# EAGLE board ALog-BottleLogger (EAGLE 8.4.0)
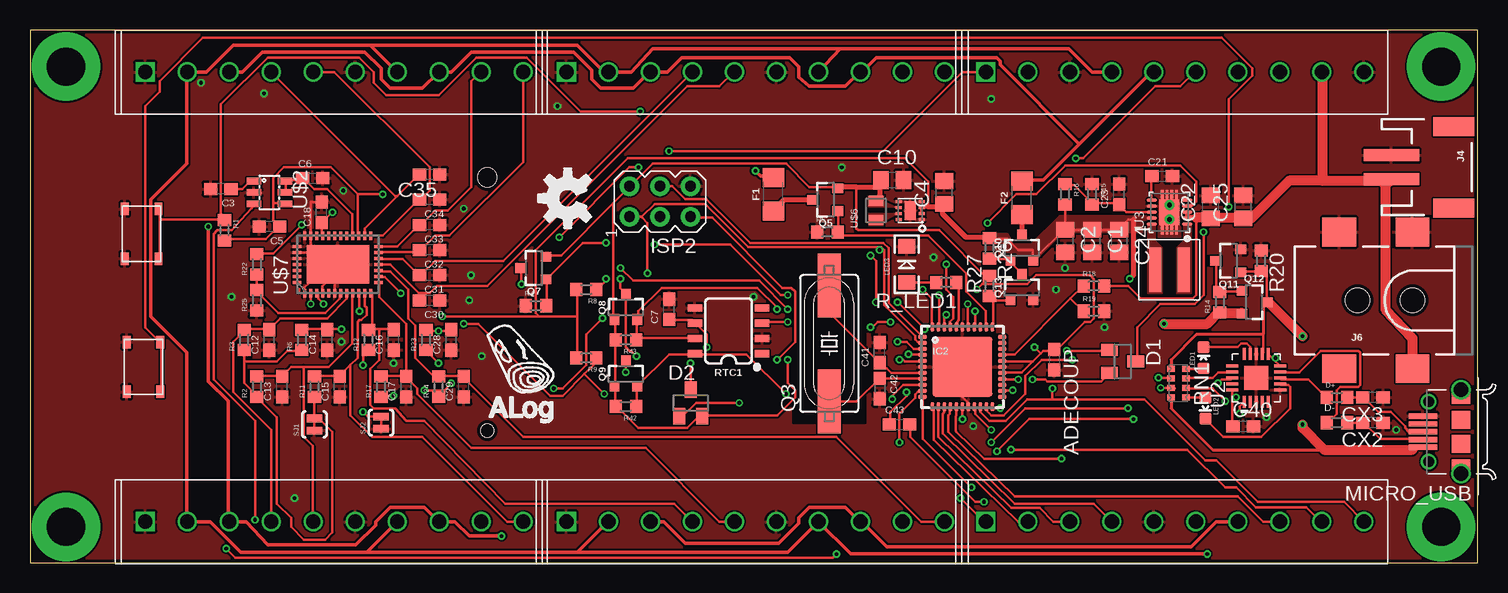
[diagram p0: board, top side]
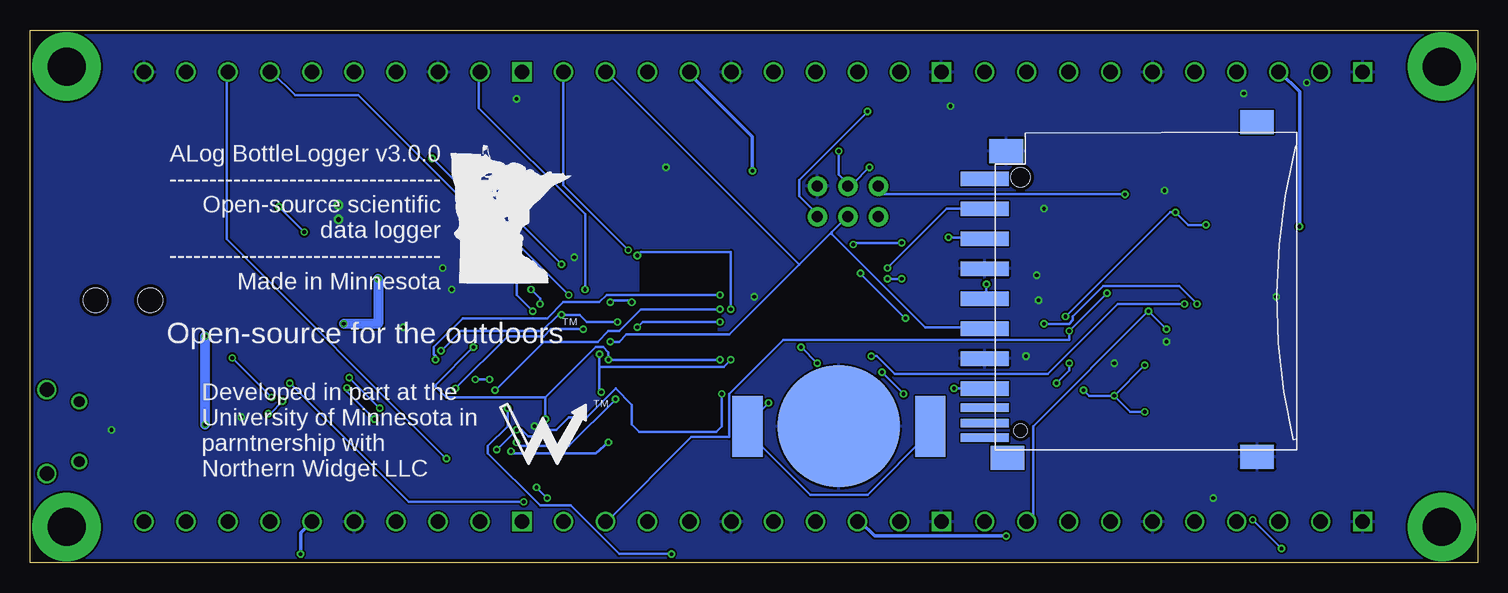
[diagram p1: board, bottom side, seen from below]

Size 120.65 x 44.45 mm. Coordinates in mm from the lower left corner, seen from the top.
Outline: 0,0 120.65,0 120.65,44.45 0,44.45 0,0
Copper layers (1*16): Top 0.035mm / dielectric 1.5mm / Bottom 0.035mm
Design rules "PCB-POOL Standard": minimum track width 0.15mm, minimum drill 0.3mm, track to track 0.15mm, track to pad 0.15mm, pad to pad 0.15mm, via to via 0.15mm, smd to smd 0.15mm, copper to edge 0.3mm, drill to drill 0.2mm, minimum pad ring 0.2mm, minimum via ring 0.15mm, stop-mask expansion 0.075mm, vias tented up to drill 0mil, thermal gap 0.2mm
Net classes: 0 default: width 0.203 mm, drill 0.305 mm

## Footprints (pad centres in the part's own frame; a part is rotated, then mirrored left to right if it is on the bottom)
C0603 = smd 1.1 x 1: 1 -0.85,0; 2 0.85,0
C0805 = smd 1.3 x 1.5: 1 -0.95,0; 2 0.95,0
LINX_BAT-HLD-012-SMT = smd 10.16 x 10.16: GND 0,0 | smd 2.54 x 5.08: POWER0 -7.62,0; POWER1 7.62,0
SOT23C = smd 1 x 1.4: 1 -0.95,-1.1; 2 0.95,-1.1; 3 0,1.1
R0603 = smd 1 x 1.1: 1 -0.85,0; 2 0.85,0
1206 = smd 1.6 x 1.8: 1 -1.4,0; 2 1.4,0
MLF44-TH = smd 0.7 x 0.3: 1 -3.325,2.5; 2 -3.325,2; 3 -3.325,1.5; 4 -3.325,1; 5 -3.325,0.5; 6 -3.325,0; 7 -3.325,-0.5; 8 -3.325,-1; 9 -3.325,-1.5; 10 -3.325,-2; 11 -3.325,-2.5; 23 3.325,-2.5; 24 3.325,-2; 25 3.325,-1.5; 26 3.325,-1; 27 3.325,-0.5; 28 3.325,0; 29 3.325,0.5; 30 3.325,1; 31 3.325,1.5; 32 3.325,2; 33 3.325,2.5 | smd 0.3 x 0.7: 12 -2.5,-3.325; 13 -2,-3.325; 14 -1.5,-3.325; 15 -1,-3.325; 16 -0.5,-3.325; 17 0,-3.325; 18 0.5,-3.325; 19 1,-3.325; 20 1.5,-3.325; 21 2,-3.325; 22 2.5,-3.325; 34 2.5,3.325; 35 2,3.325; 36 1.5,3.325; 37 1,3.325; 38 0.5,3.325; 39 0,3.325; 40 -0.5,3.325; 41 -1,3.325; 42 -1.5,3.325; 43 -2,3.325; 44 -2.5,3.325 | smd 5 x 5: TH 0,0
AVRISP = drill 0.9 pad 1.626: 1 -1.27,2.54; 2 1.27,2.54; 3 -1.27,0; 4 1.27,0; 5 -1.27,-2.54; 6 1.27,-2.54
SCREWTERMINAL-3.5MM-10 = drill 1.2 square: P$1 0,0 | drill 1.2: P$2 3.5,0; P$3 7,0; P$4 10.5,0; P$5 14,0; P$6 17.5,0; P$7 21,0; P$8 24.5,0; P$9 28,0; P$10 31.5,0
JST-2-SMD = smd 1 x 4.6: 1 -1,-3.7; 2 1,-3.7 | smd 1.6 x 3.4: NC1 -3.4,1.5; NC2 3.4,1.5
POWER_JACK_SMD = smd 2.8 x 2.4: GND 0,-5.7; P$4 6.1,-5.7; VIN0 0,5.7; VIN1 6.1,5.7 | hole 2.032: 0,0; 4.572,0
LED-0603 = smd 1 x 1: A 0,-0.877; C 0,0.877
LED-1206 = smd 1.2 x 1.4: A -1.5,0; C 1.5,0
10118194-0001LF_LONGER_PADS = smd 0.45 x 2.35: 1 -1.3,3.175; 2 -0.65,3.175; 3 0,3.175; 4 0.65,3.175; 5 1.3,3.175 | drill 0.9: P$6 -2.5,2.7; P$7 2.5,2.7 | drill 1.2: P$8 -3.5,0; P$9 3.5,0 | smd 1.5 x 1.55: P$10 -1,0; P$11 1,0; P$12 -3.05,0; P$13 3.05,0
HC49UP = smd 5.334 x 1.93: 1 -4.826,0; 2 4.826,0
SOT23-3 = smd 0.8 x 0.9: 1 -0.95,-1; 2 0.95,-1; 3 0,1.1
0603-ARC = smd 0.5 x 0.65: 1 -1.2,-0.625; 2 -0.4,-0.625; 3 0.4,-0.625; 4 1.2,-0.625; 5 1.2,0.625; 6 0.4,0.625; 7 -0.4,0.625; 8 -1.2,0.625
SO08 = smd 0.6 x 1.2: 1 -1.905,-2.8; 2 -0.635,-2.8; 3 0.635,-2.8; 4 1.905,-2.8; 5 1.905,2.8; 6 0.635,2.8; 7 -0.635,2.8; 8 -1.905,2.8
SKRPABE010_(SWITCH) = smd 1.05 x 0.65: P$1 -2.075,1.4; P$2 2.075,1.4; P$3 2.075,-1.4; P$4 -2.075,-1.4
06132 = smd 1.2 x 4: 1 6.9,0.9; 2 4.4,0.9; 3 1.9,0.9; 4 -0.6,0.9; 5 -3.1,0.9; 6 -5.6,0.9; 7 -8.1,0.9; 9 9.4,0.9 | smd 0.7 x 4: 8 -9.7,0.9; CD -11,0.9; WP -12.2,0.9 | smd 2 x 2.8: GP -13.8,-21.8; GP2 14.1,-21.8; GP3 11.7,-0.9; GP4 -13.9,-1 | hole 1.1: -11.6,-2.1 | hole 1.6: 9.5,-2.1
SJ_2S-TRACE = smd 0.635 x 1.27: 1 -0.508,0; 2 0.508,0
QFN20 = smd 1 x 0.25: 1 -2.032,0.968; 2 -2.032,0.468; 3 -2.032,-0.032; 4 -2.032,-0.532; 5 -2.032,-1.032; 11 1.968,-1.032; 12 1.968,-0.532; 13 1.968,-0.032; 14 1.968,0.468; 15 1.968,0.968 | smd 0.25 x 1: 6 -1.032,-2.032; 7 -0.532,-2.032; 8 -0.032,-2.032; 9 0.468,-2.032; 10 0.968,-2.032; 16 0.968,1.968; 17 0.468,1.968; 18 -0.032,1.968; 19 -0.532,1.968; 20 -1.032,1.968 | smd 2 x 2: 21 -0.032,-0.032
PWSON-N10 = smd 0.28 x 0.85: 1 -1,-1.475; 2 -0.5,-1.475; 3 0,-1.475; 4 0.5,-1.475; 5 1,-1.475; 6 1,1.475; 7 0.5,1.475; 8 0,1.475; 9 -0.5,1.475; 10 -1,1.475 | smd 2.15 x 1.66: THERMAL@1 0,0 | drill 0.4 pad 0.6: THERMAL@5 -0.6,0; THERMAL@6 0.6,0 | smd 0.8 x 0.23: THERMAL@7 1.46,0.6; THERMAL@8 1.46,0.2; THERMAL@9 1.46,-0.2; THERMAL@10 1.46,-0.6; THERMAL@11 -1.46,-0.6; THERMAL@12 -1.46,-0.2; THERMAL@13 -1.46,0.2; THERMAL@14 -1.46,0.6
SOT23-6L = smd 0.55 x 1.2: 1 -0.95,-1.3; 2 0,-1.3; 3 0.95,-1.3; 4 0.95,1.3; 5 0,1.3; 6 -0.95,1.3
WSON-8-PAD = smd 0.25 x 0.5: 1 -0.75,-0.95; 2 -0.25,-0.95; 3 0.25,-0.95; 4 0.75,-0.95; 5 0.75,0.95; 6 0.25,0.95; 7 -0.25,0.95; 8 -0.75,0.95 | smd 1.6 x 0.9: PAD 0,0
WURTH2.2UF = smd 0.85 x 1.2: 1 -0.8,0; 2 0.8,0
QFN38-5X7 = smd 0.7 x 0.25: 1 -2.4,2.75; 2 -2.4,2.25; 3 -2.4,1.75; 4 -2.4,1.25; 5 -2.4,0.75; 6 -2.4,0.25; 7 -2.4,-0.25; 8 -2.4,-0.75; 9 -2.4,-1.25; 10 -2.4,-1.75; 11 -2.4,-2.25; 12 -2.4,-2.75; 20 2.4,-2.75; 21 2.4,-2.25; 22 2.4,-1.75; 23 2.4,-1.25; 24 2.4,-0.75; 25 2.4,-0.25; 26 2.4,0.25; 27 2.4,0.75; 28 2.4,1.25; 29 2.4,1.75; 30 2.4,2.25; 31 2.4,2.75 | smd 0.25 x 0.7: 13 -1.5,-3.4; 14 -1,-3.4; 15 -0.5,-3.4; 16 0,-3.4; 17 0.5,-3.4; 18 1,-3.4; 19 1.5,-3.4; 32 1.5,3.4; 33 1,3.4; 34 0.5,3.4; 35 0,3.4; 36 -0.5,3.4; 37 -1,3.4; 38 -1.5,3.4 | smd 3.2 x 5.2: EXP 0,0
WE-MAIA(4.1X4.1) = smd 0.98 x 3.7: P$1 -1.185,0; P$2 1.185,0

## Placement (x,y rotation side)
ADECOUP  0.1uF  [C0603]  85.35,16.95 270 top
C1  22uF  [C0805]  88.5,26.85 270 top
C2  22uF  [C0805]  86.25,26.85 270 top
C3  0.1uF  [C0603]  15.9,31.2 180 top
C4  10uF  [C0805]  76.2,30.9 90 top
C5  0.1uF  [C0603]  19.95,28.05 180 top
C6  0.1uF  [C0603]  23.55,32.1 0 top
C7  0.1uF  [C0603]  53.25,21.15 90 top
C10  22uF  [C0805]  71.85,31.95 0 top
C12  0.1uF  [C0603]  19.95,18.6 90 top
C13  0.1uF  [C0603]  21,14.7 90 top
C14  0.1uF  [C0603]  24.75,18.6 90 top
C15  0.1uF  [C0603]  25.8,14.7 90 top
C16  0.1uF  [C0603]  30.3,18.6 90 top
C17  0.1uF  [C0603]  31.35,14.7 90 top
C18  .1uF  [C0603]  24.3,29.25 90 top
C21  0.1uF  [C0603]  94.35,32.25 0 top
C22  10uF  [C0805]  98.4,29.7 90 top
C23  33pF  [C0603]  90.75,30.75 90 top
C24  22uF  [C0805]  90.75,26.85 270 top
C25  10uF  [C0805]  101.1,29.7 90 top
C28  0.1uF  [C0603]  35.1,18.6 90 top
C29  0.1uF  [C0603]  36.15,14.7 90 top
C30  0.1uF  [C0603]  33.3,21.9 180 top
C31  0.1uF  [C0603]  33.3,24 180 top
C32  0.1uF  [C0603]  33.3,26.1 180 top
C33  0.1uF  [C0603]  33.3,28.2 180 top
C34  0.1uF  [C0603]  33.3,30.3 180 top
C35  0.1uF  [C0603]  33.3,32.4 180 top
C40  0.1uF  [C0603]  101.1,11.4 0 top
C41  33pF  [C0603]  70.8,17.55 90 top
C42  33pF  [C0603]  70.8,14.55 270 top
C43  0.1uF  [C0603]  72.45,11.55 0 top
CLOCK_BATT  3V Backup Battery  [LINX_BAT-HLD-012-SMT]  53.25,11.4 180 bottom
CX2  33pF  [C0603]  111.9,11.7 180 top
CX3  33pF  [C0603]  111.9,13.8 180 top
D1  BAT54C  [SOT23C]  91.05,16.8 270 top
D2  BAT54C  [SOT23C]  55.05,13.35 0 top
D+  27ohm  [R0603]  108.9,13.8 0 top
D-  27ohm  [R0603]  108.9,11.7 0 top
F1  PPTC_HALF-AMP  [1206]  61.95,30.75 90 top
F2  PPTC_HALF-AMP  [1206]  82.65,30.45 90 top
IC2  ATMEGA644M  [MLF44-TH]  77.7,16.35 0 top
ISP2  AVRISP-6  [AVRISP]  52.5,30.15 90 top
J1  [SCREWTERMINAL-3.5MM-10]  79.65,3.45 0 top
J2  [SCREWTERMINAL-3.5MM-10]  79.65,40.95 0 top
J4  [JST-2-SMD]  117.15,33 270 top
J6  5.5x2.1mm Barrel  [POWER_JACK_SMD]  115.2,21.9 180 top
J8  [SCREWTERMINAL-3.5MM-10]  9.6,3.45 0 top
J14  [SCREWTERMINAL-3.5MM-10]  9.6,40.95 0 top
J15  [SCREWTERMINAL-3.5MM-10]  44.7,40.95 0 top
J16  [SCREWTERMINAL-3.5MM-10]  44.7,3.45 0 top
LED1  Yellow  [LED-0603]  97.8,17.1 0 top
LED2  Blue  [LED-0603]  97.95,12.9 180 top
LED3  [LED-1206]  73.05,24.9 90 top
LOGO2  OSHW-LOGOM  [OSHW-LOGO-M]  44.81,30.41 90 top
MICRO_USB  10118194-0001LF_LONGER_PADS  [10118194-0001LF_LONGER_PADS]  119.25,10.95 90 top
Q3  [HC49UP]  66.6,18.3 90 top
Q5  4.3A/20V/54mΩ  [SOT23-3]  66.3,30.3 90 top
Q7  4.3A/20V/54mΩ  [SOT23-3]  42,24.6 90 top
Q8  220mA/50V/3.5Ω  [SOT23-3]  49.65,21.3 0 top
Q9  220mA/50V/3.5Ω  [SOT23-3]  49.65,15.75 0 top
Q10  MOSFET_PCH-IRLML2244  [SOT23-3]  82.65,26.25 0 top
Q11  220mA/50V/3.5Ω  [SOT23-3]  99.9,25.2 90 top
Q12  4.3A/20V/54mΩ  [SOT23-3]  102,21.75 270 top
Q13  MOSFET-NCH-BSS138  [SOT23-3]  82.65,22.95 0 top
R1  10k  [R0603]  16.2,27.75 270 top
R2  10k  [R0603]  18.9,14.7 90 top
R3  10k  [R0603]  17.85,18.6 90 top
R4  10k  [R0603]  42.15,21.45 0 top
R5  10k  [R0603]  66.45,27.6 0 top
R6  10k  [R0603]  22.65,18.6 90 top
R8  10k  [R0603]  46.35,22.8 180 top
R9  10k  [R0603]  46.35,17.1 180 top
R11  10k  [R0603]  23.7,14.7 90 top
R12  10k  [R0603]  28.2,18.6 90 top
R14  10k  [R0603]  99.15,21.75 90 top
R15  111k  [R0603]  88.5,30.75 270 top
R16  1M  [R0603]  86.25,30.75 270 top
R17  10k  [R0603]  29.25,14.7 90 top
R18  1M  [R0603]  88.65,23.1 0 top
R19  111k  [R0603]  88.65,21 0 top
R20  10k  [R0603]  102.6,25.2 270 top
R22  10k  [R0603]  18.9,24.9 90 top
R23  10k  [R0603]  33,18.6 90 top
R24  10k  [R0603]  34.05,14.7 90 top
R25  10k  [R0603]  18.9,21.9 90 top
R26  10k  [R0603]  79.95,26.25 270 top
R27  [R0603]  79.95,23.1 90 top
R42  10k  [R0603]  49.65,13.05 180 top
R43  10k  [R0603]  49.65,18.6 180 top
R_LED1  220  [R0603]  76.35,23.4 180 top
RN1  1K  [0603-ARC]  95.7,15 90 top
RTC1  DS3231M  [SO08]  58.2,19.35 90 top
S1  SKRPABE010  [SKRPABE010_(SWITCH)]  9.45,16.35 270 top
SD  SDMMC06132  [06132]  40.2,22.65 90 bottom
SJ1  SOLDERJUMPER-OLDTRACE  [SJ_2S-TRACE]  23.7,11.55 90 top
SJ2  SOLDERJUMPER-OLDTRACE  [SJ_2S-TRACE]  29.25,11.7 90 top
U2  FT231X-Q  [QFN20]  102.15,15.45 90 top
U3  TPS63060  [PWSON-N10]  94.95,29.25 90 top
U$2  MAX6070  [SOT23-6L]  19.95,30.9 270 top
U$3  TPS62172  [WSON-8-PAD]  73.35,29.4 90 top
U$4  SKRPABE010  [SKRPABE010_(SWITCH)]  9.3,27.45 90 top
U$6  74404020022  [WURTH2.2UF]  70.5,29.4 90 top
U$7  LTC2495  [QFN38-5X7]  25.65,24.9 90 top
U$9  1uH  [WE-MAIA(4.1X4.1)]  94.95,24.45 180 top
U$13  [MN_SILK]  77.25,23.25 0 top
U$14  ALOG_LOGO_V1_5.5MM  [ALOG_LOGO_V1_SMALL]  40.96,16.92 0 top
U$15  NWLOGO_MED  [NWLOGO_MED]  77.92,11.19 0 bottom

## Library data of the parts
ADECOUP C40 CX2 CX3 R_LED1 = resistor
C1-C7 C10 C12-C18 C21-C25 C28-C35 C41-C43 D+ D- R1-R6 R8 R9 R11 R12 R14-R20 R22-R25 R42 R43 = rcl
CLOCK_BATT U$14 U$15 = awickert
D1 D2 = semicon-smd-ipc
F1 F2 = bschulz; DIGIKEY: MF-NSMF020-2CT-ND; MF: Bourns; MPN: MF-NSMF020-2
IC2 = atmel; MPN: ATMEGA644P-20MU; OC_FARNELL: 1748528; OC_NEWARK: 26R5636
ISP2 SD = adafruit
J1 J2 J8 J14-J16 = SparkFun-Connectors
J4 = SparkFun-Connectors; PROD_ID: CONN-11443; SF_ID: PRT-08612
J6 = bschulz; DIGIKEY: 732-5929-1-ND; MF: Wurth; MPN: 694106106102
LED1-LED3 = SparkFun-LED
LOGO2 = SparkFun-Aesthetics
MICRO_USB = 10118194-0001LF
Q3 = crystal; OC_FARNELL: unknown; OC_NEWARK: unknown
Q5 Q7 Q12 = SparkFun-DiscreteSemi; PROD_ID: TRANS-11153
Q8 Q9 Q11 = SparkFun-DiscreteSemi; PROD_ID: TRANS-00830
Q10 = bschulz; DIGIKEY: FDN360PCT-ND; MF: Fairchild; MPN: FDN360P
Q13 = bschulz; DIGIKEY: BSS138LT3GOSCT-ND; MF: ON Semiconductor; MPN: BSS138LT3G
R26 R27 = bschulz; DIGIKEY: 311-10.0KHRCT-ND; MF: Yageo; MPN: RC0603FR-0710KL; VALUE_PART: 10k
RN1 = resistor-dil; OC_FARNELL: unknown; OC_NEWARK: unknown
RTC1 = SparkFun-Clocks; PROD_ID: IC-11985
S1 U$4 U$9 = Custom
SJ1 SJ2 = SparkFun-Retired
U2 = FT231X
U3 = microbuilder
U$2 = bschulz
U$3 = SparkFun-IC-Power; PROD_ID: IC-11307
U$6 = csandell; WURTH: 2.2uF
U$7 = linear-technology
U$13 = csandell

## Nets
1.8V_EN: IC2.22 U$2.3
1.8V_REF: C6.1 U$2.5 U$2.6 U$7.23
3.3V_EXT_CTRL: IC2.35 Q5.1 R5.2
5V_EXT_CTRL: IC2.34 Q13.1 R27.1
+3V3: ADECOUP.1 C5.1 C10.1 D2.2 IC2.5 IC2.17 IC2.27 IC2.29 IC2.38 ISP2.2 Q5.2 Q7.2 Q8.1 Q9.1 R1.2 R27.2 R42.2 R43.2 U$2.4 U$3.6 U$6.2 U$7.22
+5V: C1.1 C2.1 C4.1 C18.1 C24.1 Q10.2 Q12.2 R8.2 R9.2 R14.1 R16.2 R22.2 R26.1 U3.9 U$3.2 U$3.3 U$7.28 U$7.29
ADC0: C12.2 J8.P$4 R3.2 U$7.8
ADC1: C13.2 J8.P$5 R2.2 U$7.9
ADC2: C14.2 J8.P$9 R6.2 U$7.10
ADC3: C15.2 J8.P$10 R11.2 U$7.11
ADC4: C16.2 J16.P$4 R12.2 U$7.12
ADC5: C17.2 J16.P$5 R17.2 U$7.13
ADC6: C28.2 J16.P$9 R23.2 U$7.14
ADC7: C29.2 J16.P$10 R24.2 U$7.15
ADC8: C30.2 J15.P$5 U$7.16
ADC9: C31.2 J15.P$4 U$7.17
ADC10: C32.2 J14.P$10 U$7.18
ADC11: C33.2 J14.P$9 U$7.19
ADC12: C34.2 J14.P$5 U$7.20
ADC13: C35.2 J14.P$4 U$7.21
ADC16: IC2.30 R18.1 R19.1
BATT+: C22.1 C25.1 J2.P$9 J4.2 J6.VIN0 R18.2 U3.2 U3.3
D3~: IC2.43 J2.P$6
D12~: IC2.13 J1.P$3
D13~: IC2.14 J1.P$4
D14~: IC2.15 J1.P$8
D15~: IC2.16 J2.P$8
D20: IC2.23
D22: IC2.25
DTR: C43.2 U2.18
EXT_3.3V: F1.2 J1.P$6 J2.P$4 J8.P$2 J8.P$7 J14.P$2 J14.P$7 J15.P$2 J15.P$7 J16.P$2 J16.P$7
EXT_5V: F2.2 J1.P$7 J2.P$5 J8.P$3 J8.P$8 J14.P$3 J14.P$8 J15.P$3 J15.P$8 J16.P$3 J16.P$8
GND: ADECOUP.2 C1.2 C2.2 C3.2 C4.2 C5.2 C6.2 C7.2 C10.2 C12.1 C13.1 C14.1 C15.1 C16.1 C17.1 C18.2 C21.2 C22.2 C23.2 C24.2 C25.2 C28.1 C29.1 C30.1 C31.1 C32.1 C33.1 C34.1 C35.1 C40.2 C41.2 C42.2 CLOCK_BATT.GND CX2.1 CX3.1 IC2.6 IC2.18 IC2.28 IC2.39 IC2.TH ISP2.6 J1.P$5 J2.P$3 J2.P$10 J4.1 J6.GND J6.P$4 J8.P$1 J8.P$6 J14.P$1 J14.P$6 J15.P$1 J15.P$6 J16.P$1 J16.P$6 LED3.C MICRO_USB.5 Q11.2 Q13.2 R4.1 R5.1 R15.1 R19.2 R20.1 R25.1 RTC1.2 RTC1.5 S1.P$3 S1.P$4 SD.3 SD.6 SD.GP SD.GP3 SJ1.1 SJ2.1 U2.3 U2.6 U2.13 U2.21 U3.7 U3.THERMAL@1 U3.THERMAL@5 U3.THERMAL@6 U3.THERMAL@7 U3.THERMAL@8 U3.THERMAL@9 U3.THERMAL@10 U3.THERMAL@11 U3.THERMAL@12 U3.THERMAL@13 U3.THERMAL@14 U$2.2 U$3.1 U$3.4 U$3.5 U$3.PAD U$4.P$1 U$4.P$2 U$7.1 U$7.4 U$7.6 U$7.30 U$7.31 U$7.32 U$7.33 U$7.34 U$7.EXP
LED+1: LED3.A R_LED1.2
MANUAL_LOG: D1.2 IC2.26
MCU_ADC0: IC2.37 J2.P$7
MCU_ADC1: IC2.36
MCU_ADC4: IC2.33
MCU_ADC5: IC2.32
MCU_ADC6: IC2.31
MISO/D6: IC2.2 ISP2.1 J15.P$10 SD.7
MOSI/D5: IC2.1 ISP2.4 J2.P$1 SD.2
N$1: U$3.7 U$6.1
N$2: LED2.A RN1.1
N$3: LED1.A RN1.4
N$4: RN1.3 U2.17
N$5: IC2.40 R_LED1.1
N$6: CLOCK_BATT.POWER0 CLOCK_BATT.POWER1 D2.1
N$11: Q11.3 Q12.1 R14.2
N$16: R22.1 R25.2 U$7.7
N$17: F1.1 Q5.3
N$18: R12.1 R17.1 R23.1 R24.1 SJ2.2
N$20: F2.1 Q10.3
N$21: C21.1 U3.6
N$22: C23.1 R15.2 R16.1 U3.8
N$23: Q10.1 Q13.3 R26.2
N$24: R2.1 R3.1 R6.1 R11.1 SJ1.2
N$25: CX3.2 D+.2 MICRO_USB.3
N$26: CX2.2 D-.2 MICRO_USB.2
N$27: U3.1 U$9.P$1
N$28: D+.1 U2.8
N$29: RN1.2 U2.1
N$30: C40.1 U2.10 U2.11 U2.20
N$32: U3.10 U$9.P$2
N$33: LED2.C U2.7
N$35: LED1.C U2.14
N$36: D-.1 U2.9
N$37: C7.1 D2.3 RTC1.6
N$39: D1.3 S1.P$1 S1.P$2
N$40: C3.1 U$2.1
N$52: U$7.24 U$7.25
N$130: U$7.26 U$7.27
PSYNC: IC2.41 U3.4
RST: C43.1 IC2.4 ISP2.5 R1.1 U$4.P$3 U$4.P$4
RTC_INT: D1.1 IC2.42 RTC1.3
RX/INT0: IC2.11 J1.P$1
RX_USB: IC2.9 RN1.6
SCK/D7: IC2.3 ISP2.3 J15.P$9 SD.5
SCL: IC2.19 J1.P$9 Q9.2 R42.1 RTC1.8
SCL_HV: Q9.3 R9.1 U$7.2
SD_CS: IC2.24 SD.1
SD_VCC: Q7.3 SD.4
SD_VCC_CTRL: IC2.21 Q7.1 R4.2
SDA: IC2.20 J1.P$10 Q8.2 R43.1 RTC1.7
SDA_HV: Q8.3 R8.1 U$7.3
SS/D4: IC2.44 J2.P$2
TX/INT1: IC2.12 J1.P$2
TX_USB: IC2.10 RN1.7
VUSB: MICRO_USB.1 Q11.1 Q12.3 R20.2 RN1.5 RN1.8 U2.12
XTAL1: C42.1 IC2.8 Q3.1
XTAL2: C41.1 IC2.7 Q3.2

## Tracks (layer width: path | path; a pad name or v marks a point on that pad's centre or on a via)
1.8V_EN  (via drill 0.3)
  Top 0.203: v80.85,12.9 80.25,12.9 IC2.22 | v67.2,0.75 66.9,0.45 17.1,0.45 v16.35,1.2 | v18.75,3.6 18.75,11.85 15.3,15.3 15.3,27.45 15.6,27.75 16.8,27.75 18.45,29.55 U$2.3
  Bottom 0.203: v80.85,12.9 80.85,11.4 82.5,9.75 82.5,9.15 78.15,4.8 75.6,4.8 71.55,0.75 v67.2,0.75 | v18.75,3.6 v16.35,1.2
1.8V_REF
  Top 0.203: U$2.5 21.3,30.9 21.3,31.8 U$2.6 21.3,31.95 22.95,31.95 | 22.95,31.95 22.8,32.1 C6.1 22.95,31.95 | 22.95,31.95 23.7,31.2 24.75,31.2 26.85,29.1 26.85,27.3 U$7.23
3.3V_EXT_CTRL
  Top 0.203: 67.35,27.3 74.85,27.3 78,24.15 78,22.65 79.65,21 79.65,19.8 IC2.35 | 67.35,27.3 67.35,29.25 Q5.1 | 67.35,27.3 R5.2
5V_EXT_CTRL
  Top 0.203: 80.25,21.9 80.25,19.8 IC2.34 | 80.25,21.9 79.95,22.2 R27.1 80.25,21.9 | 80.25,21.9 81.6,21.9 Q13.1
+3V3  (via drill 0.3)
  Top 0.203: 72.15,29.7 72.3,29.7 U$3.6 | 70.8,30.6 U$6.2 | 67.35,31.35 Q5.2 67.2,31.35 64.95,31.35 63,33.3 51.9,33.3 50.1,31.5 ISP2.2 49.95,31.35 48.6,30 | 27.3,30.75 27.3,27.3 U$7.22 | 27.3,30.75 25.05,33 21.15,33 20.25,32.1 20.25,30 | 20.25,30 20.25,28.5 20.7,28.05 | 20.7,28.05 19.65,27 16.2,27 R1.2 | 20.7,28.05 C5.1 | 20.25,30 21.15,30 U$2.4 | 48.75,18.6 48.75,20.25 Q8.1 48.6,20.4 48.6,30 | 48.75,18.6 48.75,14.85 Q9.1 48.75,14.7 48.75,13.05 R42.2 48.9,13.05 50.7,11.25 54.75,11.25 55.65,12.15 55.95,12.15 D2.2 56.1,12.3 62.25,12.3 63.75,13.8 63.75,14.4 63.15,15 v63.15,16.95 | 48.75,18.6 R43.2 | 48.6,30 44.25,25.65 43.05,25.65 Q7.2 | v29.4,30.75 27.3,30.75 | v77.7,12 IC2.17 | v72.45,16.95 72.75,16.95 72.9,16.8 74.25,16.8 IC2.5 | 84.22,17.48 84.45,17.7 85.35,17.7 ADECOUP.1 85.35,17.85 85.65,17.85 87.9,20.1 88.35,20.1 88.65,20.4 88.65,23.7 88.35,24 83.85,24 83.1,23.25 79.35,23.25 | 84.22,17.48 83.55,16.8 | 83.55,16.8 82.65,15.9 81.15,15.9 IC2.27 | 83.55,16.8 81.15,16.8 IC2.29 | v78.15,21.6 78.15,19.8 IC2.38 | 79.8,23.7 79.95,23.85 R27.2 79.8,23.7 | 79.8,23.7 79.35,23.25 | 79.35,23.25 v78.9,22.8 | 79.8,23.7 75.75,27.75 69,27.75 68.85,27.9 68.85,31.35 | v83.7,18 84.22,17.48 | 70.8,31.95 70.8,31.35 C10.1 70.8,31.95
  Top 0.406: 70.8,30.6 70.8,31.35 68.85,31.35 67.35,31.35
  Bottom 0.203: v29.4,30.75 49.95,30.75 49.95,31.35 ISP2.2 | v77.7,12 77.7,13.8 | 77.7,13.8 73.5,18 72.9,18 72.45,17.55 v72.45,16.95 v63.15,16.95 | v78.15,21.6 78.15,22.05 v78.9,22.8 | 77.7,13.8 85.95,13.8 86.85,14.7 86.85,14.85 v83.7,18
  pour Top (no thermals): 69.9,30.6 71.1,30.6 71.1,30.15 72.15,29.7 69.9,29.7
+5V  (via drill 0.3)
  Top 0.203: 100.95,20.85 Q12.2 | 99.15,20.85 R14.1 99.15,21 | 91.95,28.65 91.5,28.65 90.75,27.9 C24.1 90.75,27.75 88.5,27.75 | 24.3,27.3 U$7.29 | 24.3,28.35 24.3,27.3 | 24.3,27.3 U$7.28 | v22.65,28.2 20.25,25.8 18.9,25.8 R22.2 | 24.3,28.35 v25.2,29.25 | 24.3,28.35 C18.1 | 45.6,20.55 45.6,22.8 R8.2 | 45.6,20.55 45.6,17.1 R9.2 | U$3.2 74.25,29.25 74.25,29.55 U$3.3 74.4,29.7 | 86.25,27.9 Q10.2 83.55,26.1 82.35,26.1 81.45,27 79.95,27 R26.1 79.95,27.15 | 86.25,27.9 R16.2 | 86.25,27.9 C2.1 86.25,27.75 88.5,27.75 | 42.45,20.55 45.6,20.55 | 42.45,20.55 42.15,20.85 42.15,26.1 49.8,33.75 72.9,33.75 74.85,31.8 74.85,29.7 | 42.45,20.55 v34.35,20.55 | 88.5,27.75 C1.1 | 76.2,29.85 76.05,29.7 C4.1 76.2,29.85
  Top 0.305: 74.85,29.7 74.4,29.7
  Top 0.406: 91.95,28.65 91.95,24 v91.65,23.7 | 74.85,29.7 76.05,29.7 76.05,29.1 78,27.15 79.95,27.15
  Top 0.813: 99.15,20.85 100.95,20.85 | v94.5,19.95 98.1,19.95 99.15,21
  Bottom 0.203: v22.65,28.2 24.15,28.2 v25.2,29.25 25.65,29.25 v34.35,20.55
  Bottom 0.813: v91.65,23.7 91.65,19.95 v94.5,19.95
  pour Top (no thermals): 92.7,28.5 92.7,27.6 86.1,27.6 84.15,25.65 81.15,25.65 81.15,26.7 80.4,26.7 80.4,27.45 81.45,27.45 81.9,26.55 83.4,26.55 85.8,28.95 93.6,28.95
ADC0
  Top 0.203: U$7.8 26.4,22.05 24.75,20.4 20.85,20.4 19.95,19.5 | 19.95,19.5 17.85,19.5 R3.2 17.85,19.35 16.95,18.45 16.95,14.25 20.1,11.1 J8.P$4 | 19.95,19.5 C12.2
ADC1
  Top 0.203: 22.8,16.35 21.75,16.35 21,15.6 | 22.8,16.35 24.9,16.35 26.85,18.3 26.85,22.5 U$7.9 | 21,15.6 18.9,15.6 R2.2 | 21,15.6 C13.2 | 22.8,16.35 22.8,10.5 23.55,9.75 23.55,3.45 J8.P$5
ADC2  (via drill 0.3)
  Top 0.203: 24.75,19.5 22.65,19.5 R6.2 | v27.45,21 27.45,22.5 U$7.10 | v25.95,19.5 24.75,19.5 | 24.75,19.5 C14.2
  Bottom 0.203: J8.P$9 37.5,3.45 37.05,3.9 37.05,11.4 v27.45,21 v25.95,19.5
ADC3
  Top 0.203: U$7.11 27.9,21.45 28.05,21.3 28.05,20.7 27.6,20.25 27.45,20.25 27.3,20.1 27.3,17.1 26.7,16.5 | 25.8,15.6 26.7,16.5 | 25.8,15.6 23.7,15.6 R11.2 | 25.8,15.6 C15.2 | J8.P$10 39.75,3.45 32.7,10.5 28.5,10.5 26.7,12.3 26.7,16.5
ADC4
  Top 0.203: 28.2,19.5 28.5,19.8 28.5,22.5 U$7.12 | 28.2,19.5 29.1,19.5 | 29.1,19.5 30.3,19.5 C16.2 | 28.2,19.5 R12.2 | 29.1,19.5 29.1,16.95 28.35,16.2 28.35,13.2 28.65,12.9 30.45,12.9 31.35,11.85 32.85,11.85 39.6,4.95 53.7,4.95 J16.P$4
ADC5
  Top 0.203: 31.35,15.6 31.35,19.95 29.1,22.2 29.1,23.4 U$7.13 | 31.35,15.6 29.25,15.6 R17.2 | 31.35,15.6 C17.2 31.35,15.45 32.25,14.55 32.25,14.1 36.75,9.6 51.3,9.6 57.45,3.45 J16.P$5
ADC6  (via drill 0.3)
  Top 0.203: v30.9,22.5 29.55,23.85 29.1,23.85 U$7.14 | C28.2 35.1,19.35 v34.05,19.35 33,19.35 R23.2
  Bottom 0.203: v30.9,22.5 v34.05,19.35 34.05,18.6 57.9,18.6 62.4,14.1 62.4,10.5 65.55,10.5 72.6,3.45 J16.P$9
ADC7
  Top 0.203: 34.05,15.6 33.6,15.6 32.1,17.1 32.1,19.8 31.5,20.4 31.5,22.8 30,24.3 29.1,24.3 U$7.15 | 34.05,15.6 36.15,15.6 C29.2 36.15,15.45 41.1,10.5 67.2,10.5 74.25,3.45 J16.P$10 | 34.05,15.6 R24.2
ADC8
  Top 0.203: U$7.16 30,24.9 32.4,22.5 | 32.4,22.5 32.4,21.9 C30.2 | 32.4,22.5 33.3,22.5 33.9,23.1 38.1,23.1 54.75,39.75 57.45,39.75 58.65,40.95 J15.P$5
ADC9
  Top 0.203: U$7.17 29.1,25.35 31.05,25.35 32.4,24 C31.2 32.55,24 33.75,25.2 39.45,25.2 J15.P$4
ADC10
  Top 0.203: U$7.18 29.1,25.95 32.25,25.95 32.4,26.1 C32.2 32.55,26.1 33.75,27.3 34.95,27.3 41.1,33.45 J14.P$10
ADC11
  Top 0.203: U$7.19 30.6,26.4 32.4,28.2 C33.2 32.55,28.2 33.75,29.4 34.8,29.4 36.75,31.35 36.75,40.2 37.5,40.95 J14.P$9
ADC12
  Top 0.203: U$7.20 29.4,27.3 32.4,30.3 C34.2 32.55,30.3 33.3,31.05 33.3,33 25.35,40.95 J14.P$5
ADC13
  Top 0.203: U$7.21 27.9,27.9 30.6,30.6 | 30.6,30.6 32.4,32.4 C35.2 | J14.P$4 30.45,30.6 30.6,30.6
ADC16
  Top 0.203: 86.7,22.05 87.75,23.1 R18.1 | 86.7,22.05 82.05,17.4 81.15,17.4 IC2.30 | 86.7,22.05 87.75,21 R19.1
BATT+
  Top 0.203: 96.45,29.25 U3.3 | 96.45,28.8 U3.2 | R18.2 91.5,23.1 92.55,22.05 96.9,22.05 97.2,22.35 97.2,28.8 | 98.4,28.8 C22.1 | 113.4,31.95 J4.2 | J2.P$9 107.7,40.95 | 101.85,28.8 C25.1
  Top 0.406: 96.45,29.25 96.45,28.8 97.2,28.8
  Top 0.813: 97.2,28.8 98.4,28.8 101.85,28.8 104.92,31.88 107.7,31.88 | J6.VIN0 115.2,18.75 112.95,21.15 112.95,31.5 | 113.4,31.95 112.95,31.5 | 112.95,31.5 112.58,31.88 107.7,31.88 | 107.7,40.95 107.7,31.88
D3~  (via drill 0.3)
  Top 0.203: v75.75,22.35 75.75,19.8 IC2.43 | v87.15,33.75 87.75,33.75 93.75,39.75 95.85,39.75 97.05,40.95 J2.P$6
  Bottom 0.203: v87.15,33.75 v75.75,22.35
D12~
  Top 0.203: J1.P$3 85.28,3.45 84.13,4.6 81.75,4.6 75.7,10.5 75.7,12.6 IC2.13
D13~
  Top 0.203: IC2.14 76.2,12.6 76.05,12.45 76.05,10.8 82.05,4.95 88.65,4.95 J1.P$4
D14~
  Top 0.203: J1.P$8 102.75,3.45 100.65,5.55 82.05,5.55 76.5,10.95 76.5,12.3 76.65,12.45 76.65,12.9 IC2.15
D15~  (via drill 0.3)
  Top 0.203: v85.95,8.7 79.5,8.7 77.2,10.94 77.15,10.99 77.15,12.23 77.2,12.28 IC2.16
  Bottom 0.203: v85.95,8.7 104.25,27 104.25,40.95 J2.P$8
DTR  (via drill 0.3)
  Top 0.203: v99,15 99.3,15.3 100.05,15.3 U2.18 | v79.5,5.1 78.75,5.1 73.35,10.5 73.35,11.55 C43.2
  Bottom 0.203: v99,15 89.1,5.1 v79.5,5.1
EXT_3.3V  (via drill 0.3)
  Top 0.203: 47.85,40.95 J15.P$2 | 61.95,32.25 F1.2 | 48.15,3.45 J16.P$2 | 13.05,40.95 J14.P$2 | 13.05,3.45 J8.P$2
  Top 0.305: J14.P$2 14.7,40.95 16.95,43.2 28.35,43.2 | J14.P$7 28.35,43.2 | 47.85,40.95 45.6,43.2 28.35,43.2 | 61.95,32.25 60.9,32.25 v60.45,32.7 | J2.P$4 88.5,40.95 86.55,42.9 67.5,42.9 | J15.P$7 67.5,42.9 | J15.P$2 50.1,40.95 51.9,42.9 67.5,42.9 | J8.P$2 15,3.45 17.55,0.9 28.05,0.9 | J8.P$7 28.05,0.9 | 45.6,0.9 48.15,3.45 | 28.05,0.9 45.6,0.9 | v98.1,0.75 68.4,0.75 J16.P$7 63.15,0.9 45.6,0.9 | 13.05,40.95 13.05,33.3 10.05,30.3 10.05,20.55 13.05,17.55 13.05,3.45
  Bottom 0.203: J15.P$7 65.7,40.8
  Bottom 0.305: v60.45,32.7 60.45,35.55 65.7,40.8 | v98.1,0.75 98.1,2.5 J1.P$6
EXT_5V  (via drill 0.3)
  Top 0.203: 34.05,3.45 J8.P$8 | 69.15,3.45 J16.P$8 69.3,3.45 | 82.65,31.95 F2.2 | 34.05,40.95 J14.P$8 | 69.15,40.95 J15.P$8 69.3,40.95 | 51.6,40.95 J15.P$3 | 16.5,3.45 J8.P$3
  Top 0.305: J8.P$3 18,3.45 19.8,1.5 27.15,1.5 28.8,3.15 28.8,3.45 30,4.65 32.85,4.65 34.05,3.45 | J16.P$3 52.8,3.45 54.6,1.65 62.4,1.65 64.05,3.3 64.05,3.75 64.95,4.65 67.95,4.65 69.15,3.45 | J1.P$7 98.85,3.45 96.75,1.35 71.4,1.35 69.3,3.45 | J8.P$8 35.4,3.45 36.6,2.25 v39.3,2.25 | 82.65,31.95 84.45,31.95 87.45,34.95 | 87.45,34.95 93.45,40.95 J2.P$5 | J14.P$3 17.7,40.95 19.35,42.6 27.9,42.6 29.25,41.25 29.25,40.35 30,39.6 32.7,39.6 34.05,40.95 | J15.P$3 53.1,40.95 54.3,42.15 63.3,42.15 64.05,41.4 64.05,40.5 64.95,39.75 67.95,39.75 69.15,40.95 | J14.P$8 35.1,40.95 36.75,42.6 45.3,42.6 46.8,41.1 46.8,40.35 47.55,39.6 50.25,39.6 51.6,40.95 | 87.45,34.95 80.85,41.55 80.85,41.85 80.55,42.15 70.5,42.15 69.3,40.95 | 16.5,3.45 16.5,13.5 14.85,15.15 v14.85,28.05
  Bottom 0.203: J16.P$3 51.45,3.45 | 16.5,40.95 J14.P$3
  Bottom 0.305: v39.3,2.25 50.25,2.25 51.45,3.45 | v14.85,28.05 14.85,39.3 16.5,40.95
GND  (via drill 0.3)
  Top 0.203: 23.39,24.9 U$7.EXP | 23.39,24.9 23.25,24.9 | 23.25,28.95 23.32,29.02 23.4,29.02 | 24.15,29.85 24.15,30.45 24.3,30.6 24.45,30.6 24.75,30.3 | 22.2,25.95 U$7.33 23.39,25.9 | 24.75,30.3 C18.2 23.4,30.1 23.4,29.02 | 24.75,30.3 24.75,30.22 | 77.7,13.84 IC2.TH 77.7,13.84 77.91,13.63 78.1,13.44 78.1,13.12 IC2.18 | U$7.6 25.4,24.65 U$7.EXP | U$7.1 22.87,22.62 22.87,22.95 24.97,24.9 U$7.EXP | U$7.4 24.37,23.07 25.42,24.15 25.65,24.08 U$7.EXP | 23.4,29.02 U$7.30 23.39,25.9 | 23.39,25.9 23.39,24.9
  other vias: 78.6,11.4 86.25,24.6 85.5,22.8 103.05,12.15 67.65,33 60.3,22.2 19.5,39.15 14.25,40.05 16.8,22.2 25.95,18.45 22.05,5.4 30.3,16.65 37.65,17.25 75.3,25.5 80.1,38.7 26.1,31.05 36.15,29.55 43.95,38.1 36.75,24 36.6,21.9 113.85,11.1 89.55,19.65
  pour Top (rank 2): 121.41,-0.53 -0.25,-0.53 -0.25,44.86 121.41,44.86
  pour Bottom: -0.5,44.5 123,44.5 123,-1.5 -0.5,-1.5
LED+1
  Top 0.203: LED3.A R_LED1.2
MANUAL_LOG  (via drill 0.3)
  Top 0.203: v82.35,15.3 81.15,15.3 IC2.26 | v83.55,15.3 84.6,15.3 84.75,15.15 89.25,15.15 D1.2
  Bottom 0.203: v83.55,15.3 v82.35,15.3
MCU_ADC0  (via drill 0.3)
  Top 0.203: v78.75,21 78.75,19.8 IC2.37
  Bottom 0.203: J2.P$7 100.5,40.95 98.55,39 93.3,39 80.1,25.8 80.1,22.35 v78.75,21
MISO/D6  (via drill 0.3)
  Top 0.203: IC2.2 74.28,18.45 73.97,18.45 73.77,18.64 73.77,18.93 71.4,21.3 71.4,21.32 71.2,21.53 71.2,26.1 70.95,26.35 70.8,26.35 | 70.8,26.35 59.85,26.35 56.26,29.94 52.06,29.94 50.99,28.88 | 50.99,28.88 ISP2.1 | 70.8,26.35 v70.8,26.1 | v43.65,14.55 44.4,14.55 46.35,16.5 46.35,19.05 v47.7,20.4 | v51.45,24.15 51.45,28.35 51,28.8 50.99,28.88
  Bottom 0.203: J15.P$10 76.2,31.5 v70.8,26.1 | v43.65,14.55 SD.7 | v51.45,24.15 v47.7,20.4
MOSI/D5  (via drill 0.3)
  Top 0.203: IC2.1 71.55,21.68 71.55,26.25 71.1,26.7 60,26.7 56.34,30.36 54.6,30.36 53.53,31.42 ISP2.4 | J2.P$1 77.7,40.95 71.1,34.35 v53.25,34.35 | v44.1,27.15 49.95,33 v50.7,33
  Bottom 0.203: v53.25,34.35 53.25,32.4 52.5,31.65 | 52.5,31.65 ISP2.4 52.5,31.5 | v44.1,27.15 41.1,27.15 SD.2 | v50.7,33 52.05,31.65 52.5,31.65
N$1
  Top 0.203: 72.15,29.1 72.3,29.1 U$3.7
  pour Top (no thermals): 72.15,29.1 69.9,29.1 69.9,28.2 71.1,28.2 71.1,28.5
N$2
  Top 0.203: RN1.1 97.95,13.8 LED2.A
N$3
  Top 0.203: RN1.4 97.8,16.2 LED1.A
N$4
  Top 0.203: RN1.3 96.45,15.45 98.55,15.45 99,15.9 100.05,15.9 U2.17
N$5
  Top 0.203: IC2.40 77.25,19.8 77.25,20.1 77.4,20.25 77.4,23.25 77.25,23.4 R_LED1.1
N$6  (via drill 0.3)
  Top 0.203: v59.1,13.35 55.5,13.35 54.45,12.3 54.15,12.3 D2.1
  Bottom 0.203: v59.1,13.35 60.75,11.7 60.75,11.4 | 60.75,11.4 60.75,10.8 55.65,5.7 50.85,5.7 45.75,10.8 45.75,11.4 CLOCK_BATT.POWER0 | 60.75,11.4 CLOCK_BATT.POWER1
N$7  (via drill 3.17)
  other vias: 3,41.4
N$8  (via drill 3.17)
  other vias: 117.6,41.4
N$9
  cutout Top: 63.6,24.9 69.6,24.9 69.6,11.7 63.6,11.7
N$10  (via drill 3.17)
  other vias: 117.6,3
N$11
  Top 0.203: 99.15,22.65 98.85,22.95 98.85,25.2 Q11.3 | 99.15,22.65 100.95,22.65 Q12.1 | 99.15,22.65 R14.2
N$12  (via drill 3.17)
  other vias: 3,3
N$13
  cutout Bottom: 63.45,25.05 69.75,25.05 69.75,11.55 63.45,11.55
N$15
  cutout Top: 94.65,26.55 94.05,27 95.85,27 95.25,26.55 95.25,22.35 94.65,22.35
N$16
  Top 0.203: U$7.7 25.8,22.5 25.8,22.05 24.6,20.85 20.7,20.85 18.9,22.65 R25.2 R22.1
N$17
  Top 0.203: 61.95,29.4 F1.1
  Top 0.406: Q5.3 62.85,30.3 61.95,29.4
N$18  (via drill 0.3)
  Top 0.203: v30.3,13.95 29.25,13.95 R17.1 | v27.75,16.5 27.75,17.25 28.2,17.7 R12.1 | v34.05,16.65 33,17.7 R23.1 | 34.5,14.4 34.05,13.95 R24.1 | 34.5,14.4 v35.1,15 | 34.5,14.4 v32.85,14.4 | SJ2.2 28.14,12.21 v27.75,12.6
  Bottom 0.203: v30.3,13.95 v27.75,16.5 | v34.05,16.65 34.05,16.05 v35.1,15 | v30.3,13.95 32.4,13.95 v32.85,14.4 | v27.75,12.6 28.95,12.6 v30.3,13.95
N$20
  Top 0.406: F2.1 Q10.3
N$21
  Top 0.203: U3.6 93.45,30.3 93.45,32.25 C21.1
N$22
  Top 0.203: U3.8 91.35,29.25 90.75,29.85 C23.1 90.75,30 88.5,30 | 88.5,30 87,31.5 86.25,31.5 R16.1 | 88.5,30 R15.2
N$23
  Top 0.203: Q13.3 82.65,24.15 81.6,25.2 Q10.1 81.6,25.35 79.95,25.35 R26.2
N$24
  Top 0.203: R3.1 17.85,16.8 | 17.85,16.8 17.85,15 18.9,13.95 R2.1 18.9,13.8 20.55,12.15 20.55,4.95 21.75,3.75 21.75,3 22.8,1.95 24.6,1.95 25.2,2.55 25.2,10.95 23.7,12.45 | 23.7,12.45 R11.1 | 17.85,16.8 20.55,16.8 21.45,17.7 22.65,17.7 R6.1 | SJ1.2 23.7,12.45
N$25
  Top 0.203: D+.2 CX3.2 111.15,13.8 112.35,12.6 113.4,12.6 114.6,11.4 114.6,11.25 114.9,10.95 MICRO_USB.3
N$26
  Top 0.203: D-.2 CX2.2 111.15,11.7 112.5,10.35 115.95,10.35 MICRO_USB.2
N$27
  pour Top (no thermals): 96.15,28.2 96.15,26.85 95.55,26.25 95.55,22.5 96.75,22.5 96.75,28.2
N$28
  Top 0.203: U2.8 104.25,15.3 106.5,15.3 108,13.8 D+.1
N$29  (via drill 0.3)
  Top 0.203: v99.6,13.5 98.55,14.55 96.45,14.55 RN1.2 | v100.8,12.45 100.8,13.05 101.1,13.35 U2.1
  Bottom 0.203: v99.6,13.5 100.65,12.45 v100.8,12.45
N$30  (via drill 0.3)
  Top 0.203: U2.10 103.65,16.95 | 103.65,16.95 U2.11 | 100.2,13.8 100.2,11.4 C40.1 | 100.2,13.8 100.2,14.4 U2.20 | v103.8,17.1 103.65,16.95 | 100.2,13.8 v100.5,13.8
  Bottom 0.203: v100.5,13.8 v103.8,17.1
N$32
  pour Top (no thermals): 93.15,28.2 93.15,22.5 94.35,22.5 94.35,26.25 93.75,26.85 93.75,28.2
N$33
  Top 0.203: LED2.C 97.95,12 99.45,10.5 102.6,10.5 105,12.9 105,14.7 104.85,14.85 104.25,14.85 U2.7
N$35
  Top 0.203: LED1.C 97.8,18 100.65,18 100.95,18.3 101.4,18.3 101.7,18 101.7,17.55 U2.14
N$36
  Top 0.203: U2.9 104.25,15.9 105.75,15.9 107.55,17.7 110.7,17.7 110.85,17.55 110.85,14.85 110.7,14.7 109.2,14.7 108.9,14.4 108.9,12.45 108.15,11.7 D-.1
N$37  (via drill 0.3)
  Top 0.203: C7.1 53.25,20.25 55.2,20.25 55.35,20.1 RTC1.6 55.5,19.95 56.4,19.05 v56.4,18 | v55.05,16.65 D2.3
  Bottom 0.203: v56.4,18 v55.05,16.65
N$39  (via drill 0.3)
  Top 0.203: S1.P$2 10.95,14.4 10.95,18.3 S1.P$1 10.8,18.45 9.6,19.65 9.6,38.1 10.8,39.3 10.8,40.2 14.4,43.8 99.3,43.8 101.85,41.25 101.85,40.65 99.9,38.7 v99.9,29.7 | v97.8,27.6 97.8,22.35 97.05,21.6 94.2,21.6 92.25,19.65 92.25,16.8 D1.3
  Bottom 0.203: v99.9,29.7 v97.8,27.6
N$40
  Top 0.203: C3.1 17.7,31.2 18.3,31.8 18.6,31.8 U$2.1
N$52
  Top 0.203: U$7.24 U$7.25
N$130
  Top 0.203: U$7.26 U$7.27
PSYNC  (via drill 0.3)
  Top 0.203: v76.35,24.9 76.35,22.8 76.95,22.2 76.95,20.4 76.65,20.1 76.65,19.8 IC2.41 | v79.8,28.35 82.2,30.75 83.85,30.75 86.25,33.15 95.85,33.15 97.2,31.8 97.2,30.15 96.9,29.85 96.45,29.85 U3.4
  Bottom 0.203: v79.8,28.35 v76.35,24.9
RST  (via drill 0.3)
  Top 0.203: 10.8,28.65 10.8,29.4 U$4.P$3 | 10.8,28.65 10.8,25.5 U$4.P$4 | 10.8,28.65 15.9,28.65 | 15.9,28.65 16.2,28.65 R1.1 15.9,28.65 | v73.2,17.4 74.25,17.4 IC2.4 | v73.05,14.25 73.05,13.95 71.7,12.6 71.7,11.55 C43.1 | v62.25,16.95 63.75,18.45 63.75,22.65 63.45,22.95 62.7,22.95 56.85,28.8 55.05,28.8 ISP2.5 | 15.9,28.65 15.9,38.25 19.8,42.15 27.45,42.15 28.65,40.95 28.65,40.05 29.7,39 34.05,39 37.2,42.15 41.4,42.15 45.9,37.65 v50.85,37.65
  Bottom 0.203: 73.2,16.35 73.2,14.4 v73.05,14.25 | 73.2,16.35 v73.2,17.4 | v62.25,16.95 62.85,16.35 73.2,16.35 | v50.85,37.65 56.55,31.95 56.55,30.6 54.9,28.95 ISP2.5
RTC_INT  (via drill 0.3)
  Top 0.203: IC2.42 76.2,20.55 v76.35,20.7 | v86.4,17.7 89.85,17.7 D1.1 | v63.15,20.1 61.05,20.1 RTC1.3 | v71.7,20.1 70.65,20.1 70.2,19.65 v70.05,19.65
  Bottom 0.203: v86.4,17.7 84.75,19.35 78,19.35 76.65,20.7 v76.35,20.7 74.85,20.7 74.25,20.1 v71.7,20.1 | v63.15,20.1 69.6,20.1 v70.05,19.65
RX/INT0  (via drill 0.3)
  Top 0.203: v78.45,6.3 74.4,10.35 74.4,13.8 IC2.11 | v77.55,5.4 79.5,3.45 J1.P$1
  Bottom 0.203: v77.55,5.4 v78.45,6.3
RX_USB  (via drill 0.3)
  Top 0.203: v94.05,15.45 94.95,15.45 RN1.6 | v91.5,12.9 82.95,12.9 v80.1,10.05 | v71.85,13.65 71.85,13.95 72.75,14.85 IC2.9
  Bottom 0.203: v91.5,12.9 v94.05,15.45 | v80.1,10.05 79.8,9.75 75.75,9.75 v71.85,13.65
SCK/D7  (via drill 0.3)
  Top 0.203: IC2.3 73.65,17.85 73.05,18.45 v72.3,18.45
  Bottom 0.203: v72.3,18.45 71.55,18.45 70.95,19.05 62.4,19.05 56.55,24.9 | 53.85,27.6 52.5,28.95 ISP2.3 | 53.85,27.6 56.55,24.9 | 56.55,24.9 72.6,40.95 J15.P$9 | 53.85,27.6 53.85,27.45 46.05,19.65 41.1,19.65 SD.5
SCL  (via drill 0.3)
  Top 0.203: R42.1 50.55,13.05 50.55,14.7 Q9.2 53.25,17.4 55.35,17.4 RTC1.8 55.5,17.4 59.7,17.4 v63,14.1 | v80.1,11.1 78.75,12.45 78.75,12.9 IC2.19 | v81.75,9.45 96.45,9.45 99.6,6.3 100.5,6.3 102.15,4.65 106.35,4.65 107.55,3.45 J1.P$9
  Bottom 0.203: v81.75,9.45 v80.1,11.1 79.68,11.1 79.13,10.55 78.07,10.55 77.52,11.1 76.8,11.1 75.75,12.15 74.25,12.15 71.85,14.55 70.5,13.2 70.5,11.55 69.9,10.95 63.45,10.95 63,11.4 v63,14.1
SCL_HV  (via drill 0.3)
  Top 0.203: v23.4,21.6 U$7.2 | v36.15,19.95 37.35,19.95 43.35,13.95 44.4,13.95 46.2,15.75 | 46.2,15.75 47.1,16.65 47.1,17.1 R9.1 | v49.65,15.9 Q9.3 | 46.2,15.75 v47.85,14.1
  Bottom 0.203: v23.4,21.6 24.9,23.1 31.2,23.1 33.75,20.55 33.75,20.25 34.05,19.95 v36.15,19.95 | v47.85,14.1 v49.65,15.9
SD_CS  (via drill 0.3)
  Top 0.203: v81.9,14.4 81.15,14.4 IC2.24 | v63.15,21.15 60.75,23.55 50.25,23.55 v49.2,24.6
  Bottom 0.203: v81.9,14.4 77.85,18.45 73.35,18.45 72.45,19.35 71.55,19.35 69.75,21.15 v63.15,21.15 | v49.2,24.6 44.25,29.55 SD.1
SD_VCC  (via drill 0.3)
  Top 0.203: v40.95,23.25 40.95,24.6 Q7.3
  Bottom 0.203: v40.95,23.25 40.95,22.2 SD.4
SD_VCC_CTRL  (via drill 0.3)
  Top 0.203: v86.85,16.95 84.3,16.95 82.95,15.6 82.95,14.1 81.15,12.3 80.1,12.3 79.65,12.75 79.65,12.9 IC2.21 | v63.15,22.35 62.55,22.35 58.35,26.55 v52.05,26.55 | v48,26.7 46.05,26.7 Q7.1 43.05,23.55 43.05,21.45 R4.2
  Bottom 0.203: v86.85,16.95 86.85,17.25 87,17.4 87,18 84.6,20.4 77.55,20.4 76.2,21.75 73.2,21.75 72.6,22.35 v63.15,22.35 | v52.05,26.55 51.9,26.7 v48,26.7
SDA  (via drill 0.3, 0.35)
  Top 0.203: 50.55,18.75 50.55,18.6 R43.1 50.55,18.75 | 50.55,18.75 50.55,20.25 Q8.2 50.7,20.4 50.7,21 52.65,22.95 60.6,22.95 62.25,21.3 v62.25,21.15 | 50.55,18.75 55.35,18.75 RTC1.7 | IC2.20 79.2,12.6 79.95,11.85 81.3,11.85 83.1,13.65 85.2,13.65 | 85.2,13.65 92.85,13.65 97.95,8.55 98.85,8.55 102.3,5.1 109.5,5.1 J1.P$10 | v74.55,19.5 v72.3,21.75 | 85.2,13.65 v85.2,14.55 | v70.5,21.75 70.5,25.2 v70.05,25.65
  Bottom 0.203: v62.25,21.15 62.25,25.95 69.75,25.95 v70.05,25.65 | v74.55,19.5 77.25,19.5 77.85,18.9 80.85,18.9 v85.2,14.55 | v70.5,21.75 70.65,21.9 72.15,21.9 v72.3,21.75
SDA_HV  (via drill 0.3)
  Top 0.203: v24.45,21.6 24,22.05 24,22.5 U$7.3 | v50.55,17.25 50.1,17.7 49.95,17.7 49.65,18 Q8.3 49.65,22.5 49.2,22.95 v49.2,23.7 | v48,23.7 48,23.55 47.25,22.8 R8.1
  Bottom 0.203: v24.45,21.6 30,21.6 35.85,15.75 48.6,15.75 50.1,17.25 v50.55,17.25 | v49.2,23.7 v48,23.7
SS/D4  (via drill 0.3)
  Top 0.203: v74.4,22.8 75.15,22.05 75.15,19.8 IC2.44
  Bottom 0.203: v74.4,22.8 74.4,29.1 83.25,37.95 83.25,40.95 J2.P$2
TX/INT1
  Top 0.203: IC2.12 75.3,12.93 75.3,10.25 82.35,3.45 J1.P$2
TX_USB  (via drill 0.3)
  Top 0.2: 95.1,14.61 95.1,14.55
  Top 0.203: 95.4,14.55 95.1,14.55 RN1.7 | IC2.10 74.28,14.25 73.97,14.25 73.77,14.06 73.77,13.76 72.45,12.45 v72.45,10.05 | v91.95,12 83.25,12 80.55,9.3 v80.58,9.31 | v94.23,14.61 95.1,14.61
  Bottom 0.203: v72.45,10.05 73.5,9.15 80.4,9.15 v80.58,9.31 | v91.95,12 94.23,14.28 v94.23,14.61
VUSB  (via drill 0.3)
  Top 0.203: 102.6,24.3 100.95,24.3 Q11.1 | 103.05,21.75 103.05,23.85 102.6,24.3 | 102.6,24.3 R20.2 | 102.75,19.05 102.75,17.55 U2.12 | 103.05,21.75 102.75,21.45 | Q12.3 103.05,21.75 | 95.1,16.2 RN1.5 | 115.2,9.45 MICRO_USB.1 | 95.1,13.8 RN1.8
  Top 0.254: 102.75,21.45 102.75,19.05 97.2,19.05 95.1,16.95 95.1,16.2 | 107.85,9.45 98.55,9.45 95.1,12.9 95.1,13.8
  Top 0.813: 115.2,9.45 107.85,9.45 106.05,11.25 v106.05,11.55 | v106.05,18.9 103.2,21.75 Q12.3
  Bottom 0.813: v106.05,11.55 v106.05,18.9
XTAL1
  Top 0.203: Q3.1 68.87,13.47 C42.1 74.33,15.4 IC2.8
XTAL2
  Top 0.203: Q3.2 66.6,20.9 C41.1 71.3,16.2 71.4,16.2 71.76,15.85 IC2.7

## Text on the board
bPlace: ALog BottleLogger v3.0.0 / ---------------------------------- / Open-source scientific / data logger / ---------------------------------- / Made in Minnesota | TM | Open-source for the outdoors | Developed in part at the / University of Minnesota in / parntnership with / Northern Widget LLC | TM
tDocu: GND | 3V3 | 5V | A13 | A12 | GND | 3V3 | 5V | A11 | A10 | GND | 3V3 | 5V | A9 | A8 | GND | 3V3 | 5V | SCK | MISO | MOSI | SS/D4~ | GND | 3V3 | 5V | D3~ | ADC0 | D15~ | BATT | GND | RESET | LOG | RX/INT0 | TX/INT1 | D12~ | D13~ | GND | 3V3 | 5V | D14~ | SCL | SDA | GND | 3V3 | 5V | A0 | A1 | GND | 3V3 | 5V | A2 | A3 | GND | 3V3 | 5V | A4 | A5 | GND | 3V3 | 5V | A6 | A7